# Altium PCB Joystick.PcbDoc
Units mm, origin at the board's own origin, x right, y up, seen from the top; angles counter-clockwise.
Board outline 40.88 x 23.94 mm, 2 copper layers (Top Layer, Bottom Layer); 6 components, 4 nets, 22 pads, 48 vias.
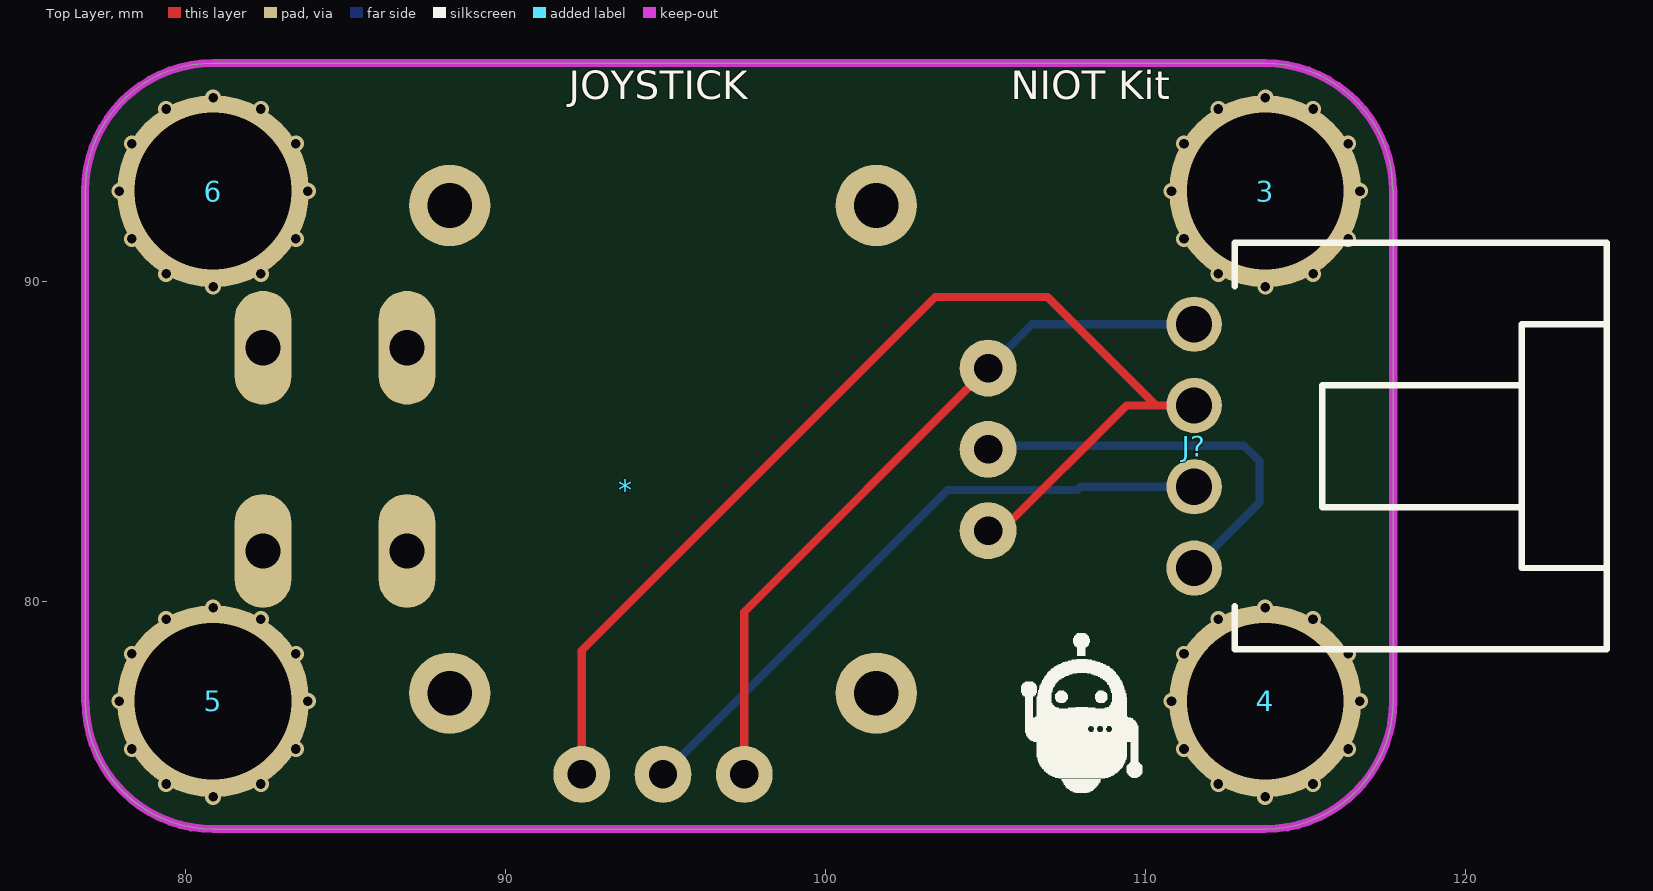
[diagram p0: Top Layer view]
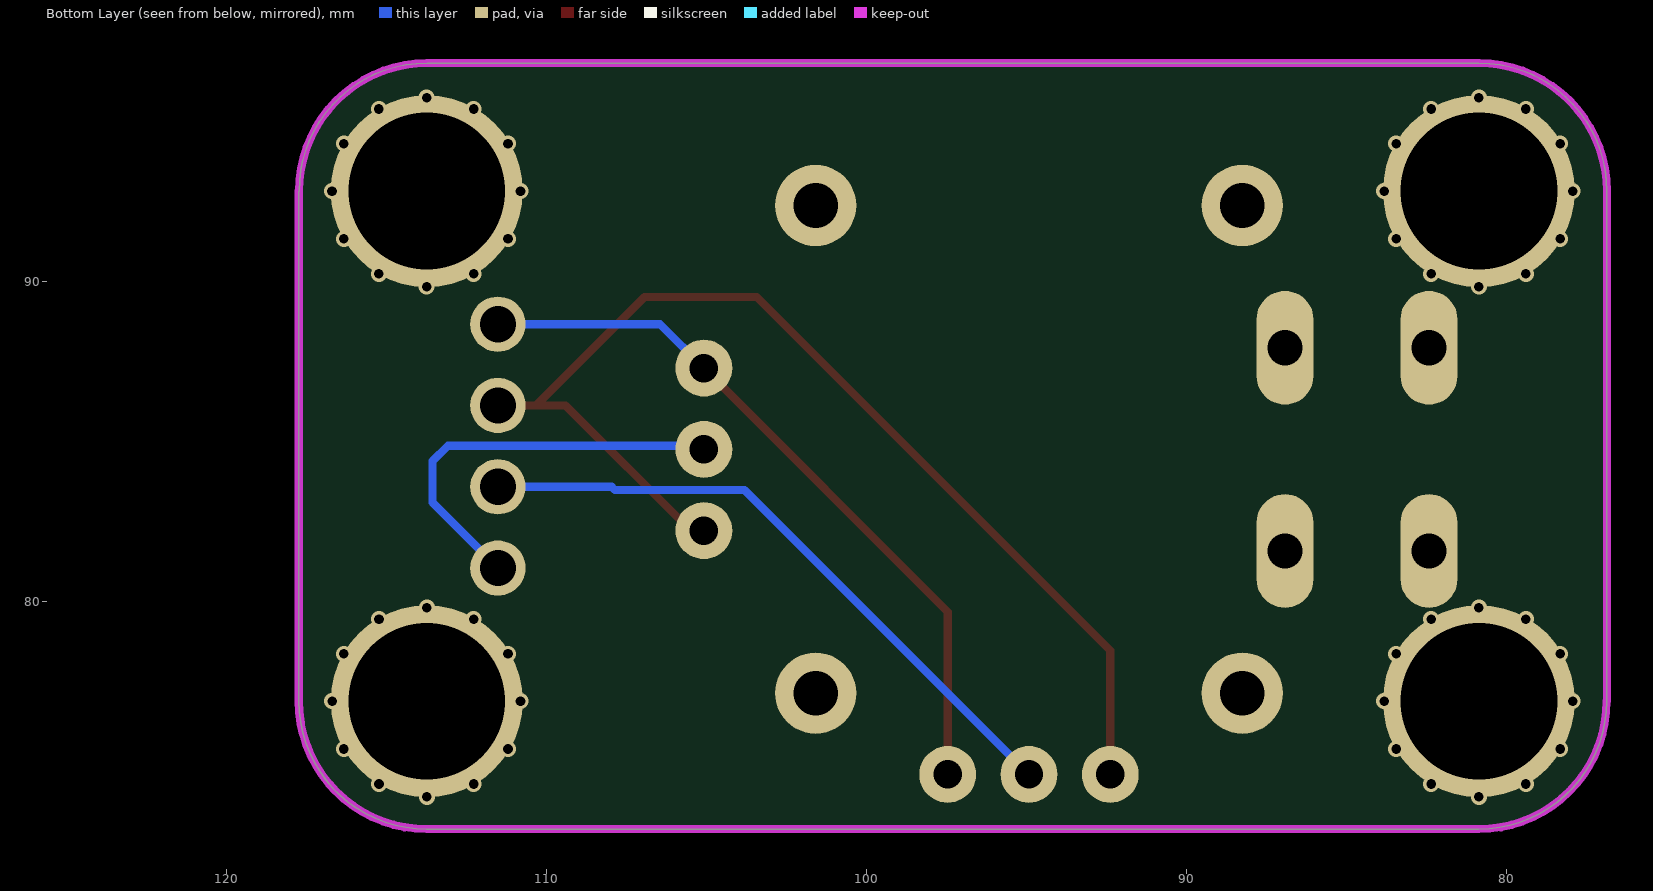
[diagram p1: Bottom Layer view, seen from below]

## Layer stack, top to bottom
Top Solder: solder mask 0.0102, Solder Resist, Dk 3.5
Top Layer: signal copper 0.0356
Dielectric 1: dielectric 0.32, FR-4, Dk 4.8
Bottom Layer: signal copper 0.0356
Bottom Solder: solder mask 0.0102, Solder Resist, Dk 3.5

## Board outline
76.85,76.88 76.85,92.82 cw(c80.85,92.82) 80.85,96.82 113.72,96.82 cw(c113.72,92.82) 117.72,92.82 117.729,92.82 117.729,76.88 cw(c113.729,76.88) 113.729,72.88 80.859,72.88 cw(c80.859,76.88)

## Design rules (kind name [scope] priority, off if disabled: settings)
Clearance [All] p1: gap=0.254 ignorepadtopadclearanceinfootprint=FALSE except(0: Arc-Hole Track-Hole SMDPad-Hole THPad-Hole Via-Hole Fill-Hole Poly-Hole Region-Hole Text-Hole)
PolygonConnect [All] p1: connectstyle=Relief reliefconductorwidth=0.254 reliefentries=4 polygonreliefangle="90 Angle" airgapwidth=0.254
RoomDefinition Joystick [InComponentClass('Joystick')] p1: confinementstyle=ConfineIn formatcopy=TRUE lockcomponents=FALSE outline 178.943,26.924 198.247,26.924 198.247,44.577 178.943,44.577
RoutingVias [All] p1: holewidth=0.711 width=1.27 viastyle="Through Hole" minholewidth=0.711 minwidth=1.27 maxholewidth=0.711 maxwidth=1.27
SolderMaskExpansion [All] p1: expansion=0.102
Width [All] p1: maxlimit=0.254 minlimit=0.254 preferedwidth=0.254
30 further rules are at their usual default settings.

## Classes and differential pairs
component class Joystick: *

## Components (designator, comment, footprint, x,y, rotation, side; value= is the part's Value field where it differs from the comment)
3 "Lego" "Lego Hole" 113.73,92.82 r90 top
4 "Lego" "Lego Hole" 113.729,76.88 r90 top (schematic designator 3)
5 "Lego" "Lego Hole" 80.849,76.88 r90 top (schematic designator 3)
6 "Lego" "Lego Hole" 80.849,92.82 r90 top (schematic designator 3)
* "Joystick" Joystick 94.91,84.75 r90 top
J? "r4" "MOLEX SDA-70553-4PIN" 117.73,84.85 r270 top

## Footprints (in the part's own frame and the unit in brackets; to place one, negate y for a bottom-side part, rotate by r counter-clockwise, add the part's x,y. Pads: shape width x height; smd on the part's side, far side on the other; paste and mask are expansions set on the pad)
Joystick [mil] "2 axis Joystick"
  oval 140x70 / inner round 60 / far side oval 140x70 hole 43.31: B1A(-125,492.17) B1B(125,492.17) S1(125,315) S2(-125,315)
  round 70 / inner round 60 / far side round 70 hole 35: H1(-100,-400) H2(0,-400) H3(100,-400) V1(-400,100) V2(-400,0) V3(-400,-100)
  round 100 / inner round 60 / far side round 100 hole 55: MOUNT1(-300,262.5) MOUNT2(-300,-262.5) MOUNT3(300,-262.5) MOUNT4(300,262.5)
  body extent -515,-527 520,617, height 1185
"Lego Hole" [mm]
  round 6 hole 4.9: ""(0,0)
"MOLEX SDA-70553-4PIN" [mm] "SL Right Angle Header W/LAtch & Trip-Pegs 2.54mm Centres"
  round 1.73 hole 1.13: 1(-3.81,-6.223) 2(-1.27,-6.223) 3(1.27,-6.223) 4(3.81,-6.223)
  silkscreen extent -6.35,-4.95 6.35,6.68, body extent -6.35,-6.92 6.35,6.67, height 6.98

## Via types
v1: diameter 0.5, hole 0.3, Top Layer to Bottom Layer, 48 vias

## Nets (pads, with @x,y where several pads share a name; then routed paths per layer and width w, separated by ;. In a path a pad name is that pad's centre, name@x,y a point inside that pad or via, vN(x,y) a via of type N, cw(c..) or ccw(c..) an arc to the next point about the centre after c; other vN are vias at no path point)
GND: *.H3 *.V3 J?.1 | length 22.9
  Top Layer w0.254: *.V3 97.45,79.67 *.H3
  Bottom Layer w0.254: *.H3 106.44,88.66 J?.1
H: *.H2 J?.4 | length 12.9
  Bottom Layer w0.254: *.H2 105.181,84.861 113.069,84.861 113.55,84.38 113.55,83.083 J?.4
V: *.V2 J?.3 | length 20.3
  Bottom Layer w0.254: *.V2 103.8,83.48 107.848,83.48 107.948,83.58 J?.3
VCC: *.H1 *.V1 J?.2 | length 35.9
  Top Layer w0.254: *.V1 92.37,78.462 103.418,89.51 106.93,89.51 110.32,86.12 ; *.H1 105.48,82.21 109.39,86.12 110.32,86.12 ; J?.2 110.32,86.12
pads on no net: 3. 4. 5. 6. *.B1A *.B1B *.MOUNT1 *.MOUNT2 *.MOUNT3 *.MOUNT4 *.S1 *.S2
copper on no net:
  other v1: 80.849,73.891 113.729,73.891 79.383,74.291 82.343,74.291 112.263,74.291 115.223,74.291 78.311,75.386 83.438,75.386 111.191,75.386 116.318,75.386 77.919,76.88 83.809,76.88 110.799,76.88 116.689,76.88 78.311,78.361 83.438,78.361 111.191,78.361 116.318,78.361 79.383,79.444 82.343,79.444 112.263,79.444 115.223,79.444 80.849,79.801 113.729,79.801 80.849,89.831 113.73,89.831 79.383,90.231 82.343,90.231 112.264,90.231 115.225,90.231 78.311,91.325 83.438,91.325 111.192,91.325 116.319,91.325 77.919,92.82 83.809,92.82 110.8,92.82 116.69,92.82 78.311,94.301 83.438,94.301 111.192,94.301 116.319,94.301 79.383,95.384 82.343,95.384 112.264,95.384 115.225,95.384 80.849,95.741 113.73,95.741

## Keep-outs
Keep-Out Layer:
  lines w0.254: 76.85,76.88 76.85,92.82 cw(c80.85,92.82) 80.85,96.82 113.72,96.82 cw(c113.72,92.82) 117.72,92.82 ; 76.859,76.88 ccw(c80.859,76.88) 80.859,72.88 113.729,72.88 ccw(c113.729,76.88) 117.729,76.88 117.729,92.82

## Silkscreen, mask and mechanical layers (free items; w line width, h text height)
Top Overlay:
  drawing of 381 lines, arcs and shapes, not listed
  text "NIOMATIC INC © 2018" at 133.93,104.91 h1.52
  text "JOYSTICK" at 91.96,95.4 h1.52
  text "NIOT Kit" at 105.77,95.4 h1.52